# Altium PCB PCB_TPS5530RTE.PcbDoc
Units mil, origin at the board's own origin, x right, y up, seen from the top; angles counter-clockwise.
Board outline 6000 x 4000 mil, 2 copper layers (Top Layer, Bottom Layer); 13 components, 0 nets, 42 pads, 0 vias.
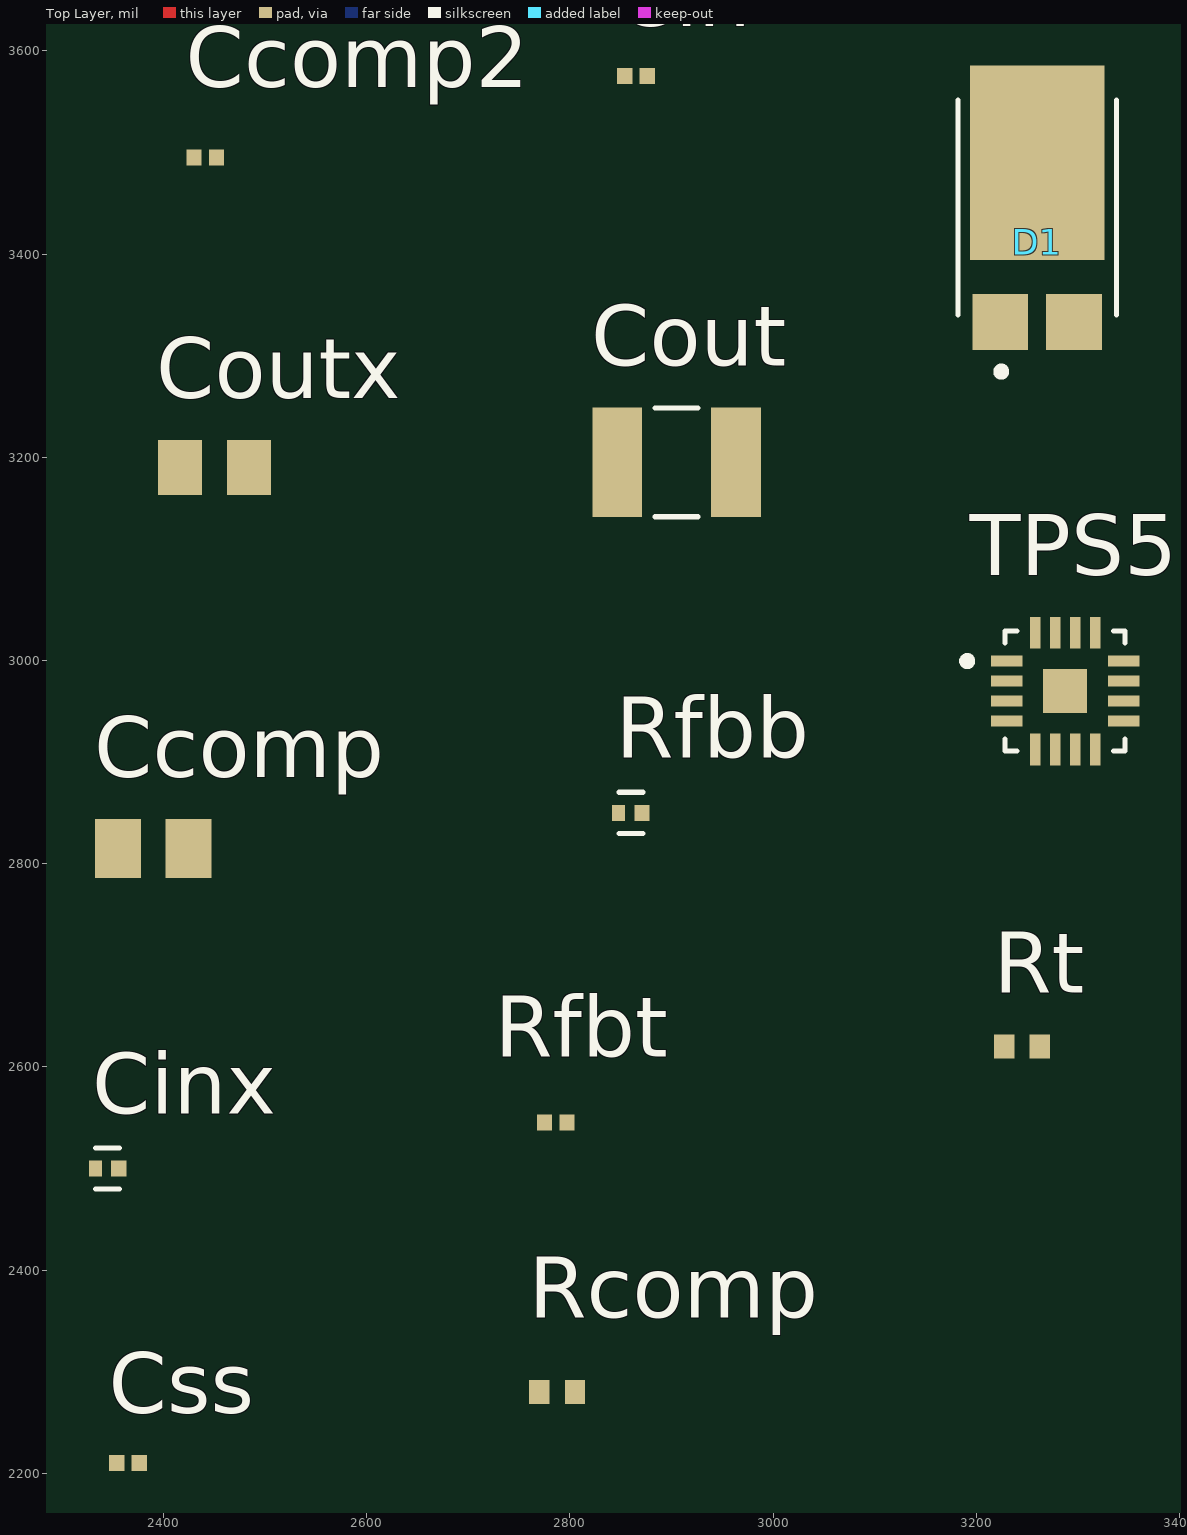
[diagram p0: Top Layer view]
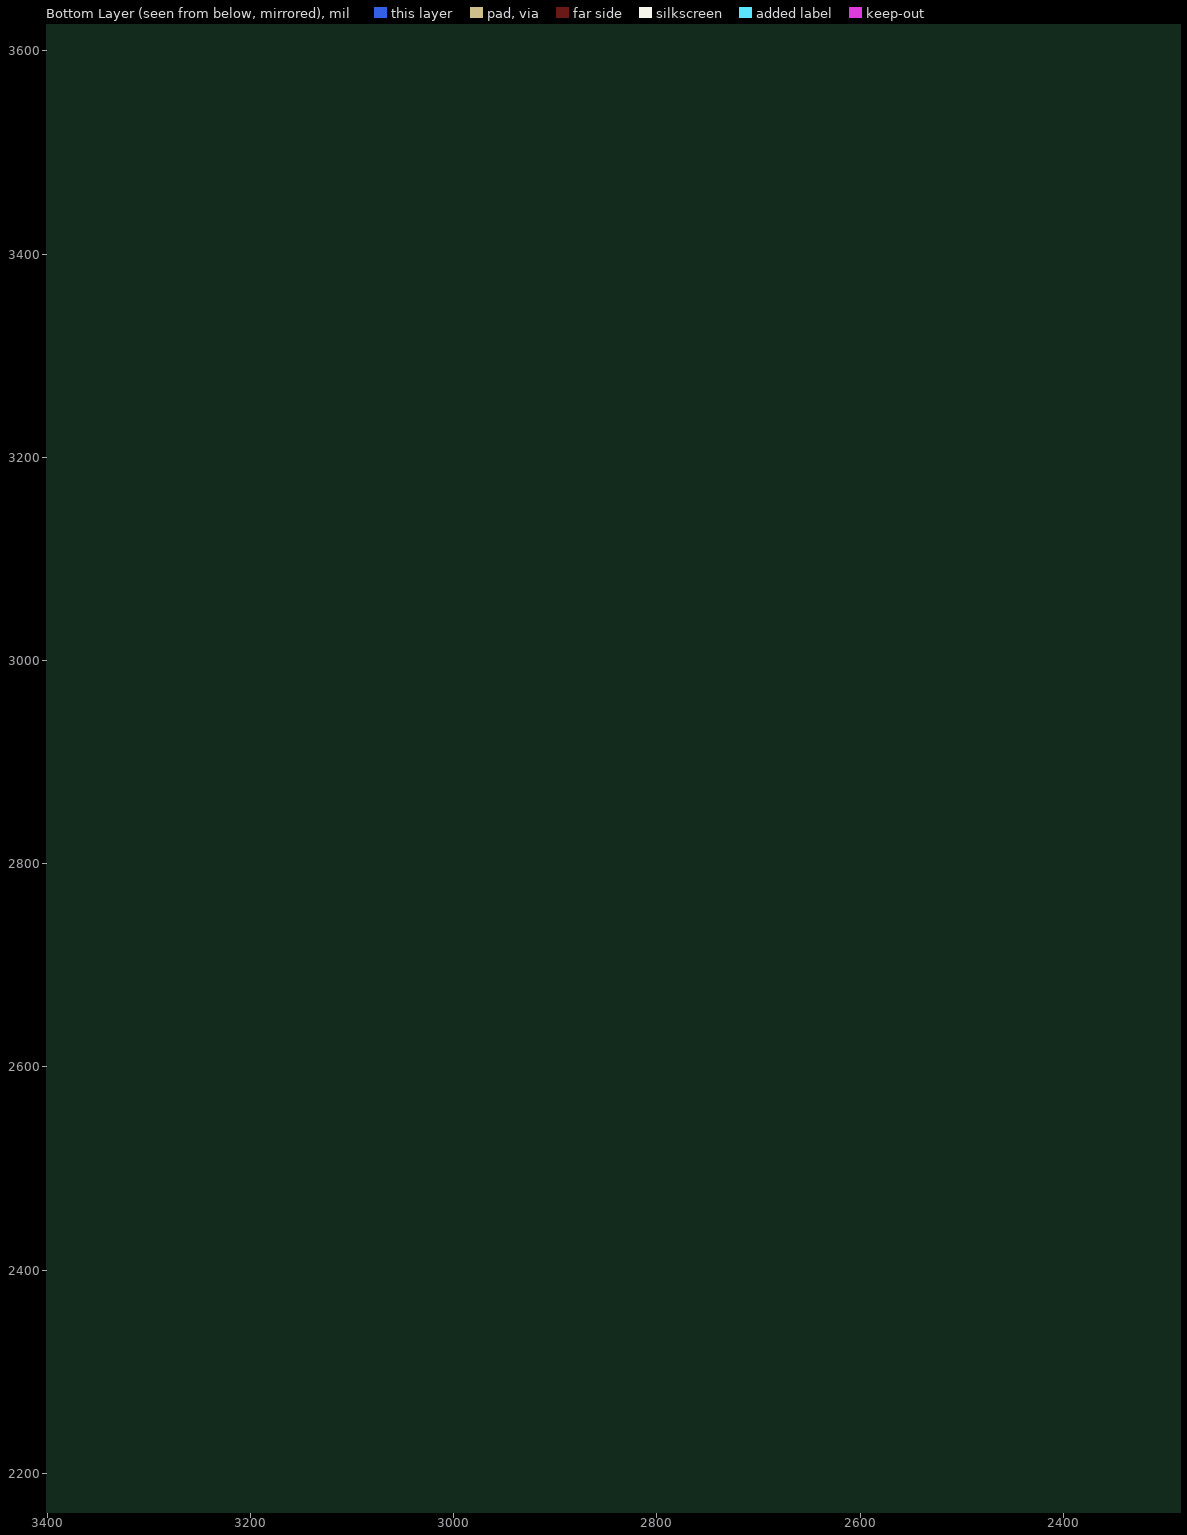
[diagram p1: Bottom Layer view, seen from below]

## Layer stack, top to bottom
Top Solder: solder mask 0.4, Solder Resist, Dk 3.5
Top Layer: signal copper 1.4
Dielectric 1: dielectric 12.6, FR-4, Dk 4.8
Bottom Layer: signal copper 1.4
Bottom Solder: solder mask 0.4, Solder Resist, Dk 3.5

## Board outline
1000,1000 7000,1000 7000,5000 1000,5000

## Design rules (kind name [scope] priority, off if disabled: settings)
Clearance [All] p1: gap=10 ignorepadtopadclearanceinfootprint=FALSE except(0: Arc-Hole Track-Hole SMDPad-Hole THPad-Hole Via-Hole Fill-Hole Poly-Hole Region-Hole Text-Hole)
PolygonConnect [All] p1: connectstyle=Relief reliefconductorwidth=10 reliefentries=4 polygonreliefangle="90 Angle" airgapwidth=10
RoutingVias [All] p1: holewidth=28 width=50 viastyle="Through Hole" minholewidth=28 minwidth=50 maxholewidth=28 maxwidth=50
SolderMaskExpansion [All] p1: expansion=4
Width [All] p1: maxlimit=10 minlimit=10 preferedwidth=10
30 further rules are at their usual default settings.

## Components (designator, comment, footprint, x,y, rotation, side; value= is the part's Value field where it differs from the comment)
Ccomp "Comment" *CAPC2012X145N 2390,2815 r0 top
Ccomp2 "Comment" *CAPC0603X33N 2441.06,3495 r0 top
Cin "Comment" *CAPC0603X33N 2865,3575 r0 top
Cinx "Comment" *RESC0603X26N 2345,2500 r0 top
Cout "Comment" *CAPC3225X280N 2905,3195 r0 top
Coutx "Comment" *CAPC2012X135N 2450,3190 r0 top
Css "Comment" *CAPC0603X33N 2365,2210 r0 top
D1 "Comment" *DIO_PDS360-13 3260,3445.67 r0 top
Rcomp "Comment" *RESC1005X40N 2787.48,2280 r0 top
Rfbb "Comment" *RESC0603X26N 2860,2850 r0 top
Rfbt "Comment" *CAPC0603X33N 2786.06,2545 r0 top
Rt "Comment" *RESC1005X40N 3245,2620 r0 top
TPS55330RTER "Comment" *QFN50P300X300X80-17N 3287.52,2969.84 r0 top

## Footprints (in the part's own frame and the unit in brackets; to place one, negate y for a bottom-side part, rotate by r counter-clockwise, add the part's x,y. Pads: shape width x height; smd on the part's side, far side on the other; paste and mask are expansions set on the pad)
*CAPC0603X33N [mm]
  rect 0.38x0.4 smd: 1(-0.281,0) 2(0.281,0)
*CAPC2012X135N [mm]
  rect 1.1x1.38 smd: 1(-0.863,0) 2(0.863,0)
*CAPC2012X145N [mm]
  rect 1.15x1.47 smd: 1(-0.88,0) 2(0.88,0)
*CAPC3225X280N [mm]
  rect 1.24x2.73 smd: 1(-1.485,0) 2(1.485,0)
  silkscreen extent -0.54,-1.36 0.54,1.36
*DIO_PDS360-13 [mm]
  rect 1.39x1.4 smd: 1(-0.92,-2.856) 2(0.92,-2.856)
  rect 3.36x4.86 smd: 3(0,1.126)
  silkscreen extent -1.98,-4.2 1.98,2.69
*QFN50P300X300X80-17N [mm]
  rect 0.79x0.27 smd: 1(-1.46,0.75) 2(-1.46,0.25) 3(-1.46,-0.25) 4(-1.46,-0.75) 9(1.46,-0.75) 10(1.46,-0.25) 11(1.46,0.25) 12(1.46,0.75)
  rect 0.27x0.79 smd: 5(-0.75,-1.46) 6(-0.25,-1.46) 7(0.25,-1.46) 8(0.75,-1.46) 13(0.75,1.46) 14(0.25,1.46) 15(-0.25,1.46) 16(-0.75,1.46)
  rect 1.1x1.1 smd: 17(0,0)
  silkscreen extent -2.55,-1.5 1.5,1.5
*RESC0603X26N [mm]
  rect 0.33x0.4 smd: 1(-0.305,0)
  rect 0.38x0.4 smd: 2(0.28,0)
  silkscreen extent -0.3,-0.52 0.3,0.52
*RESC1005X40N [mm]
  rect 0.51x0.6 smd: 1(-0.445,0) 2(0.445,0)

## Nets (pads, with @x,y where several pads share a name; then routed paths per layer and width w, separated by ;. In a path a pad name is that pad's centre, name@x,y a point inside that pad or via, vN(x,y) a via of type N, cw(c..) or ccw(c..) an arc to the next point about the centre after c; other vN are vias at no path point)
pads on no net: Ccomp2.1 Ccomp2.2 Ccomp.1 Ccomp.2 Cin.1 Cin.2 Cinx.1 Cinx.2 Cout.1 Cout.2 Coutx.1 Coutx.2 Css.1 Css.2 D1.1 D1.2 D1.3 Rcomp.1 Rcomp.2 Rfbb.1 Rfbb.2 Rfbt.1 Rfbt.2 Rt.1 Rt.2 TPS55330RTER.1 TPS55330RTER.2 TPS55330RTER.3 TPS55330RTER.4 TPS55330RTER.5 TPS55330RTER.6 TPS55330RTER.7 TPS55330RTER.8 TPS55330RTER.9 TPS55330RTER.10 TPS55330RTER.11 TPS55330RTER.12 TPS55330RTER.13 TPS55330RTER.14 TPS55330RTER.15 TPS55330RTER.16 TPS55330RTER.17